# EAGLE board Zio Eink Display 2.1 (EAGLE 8.6.1)
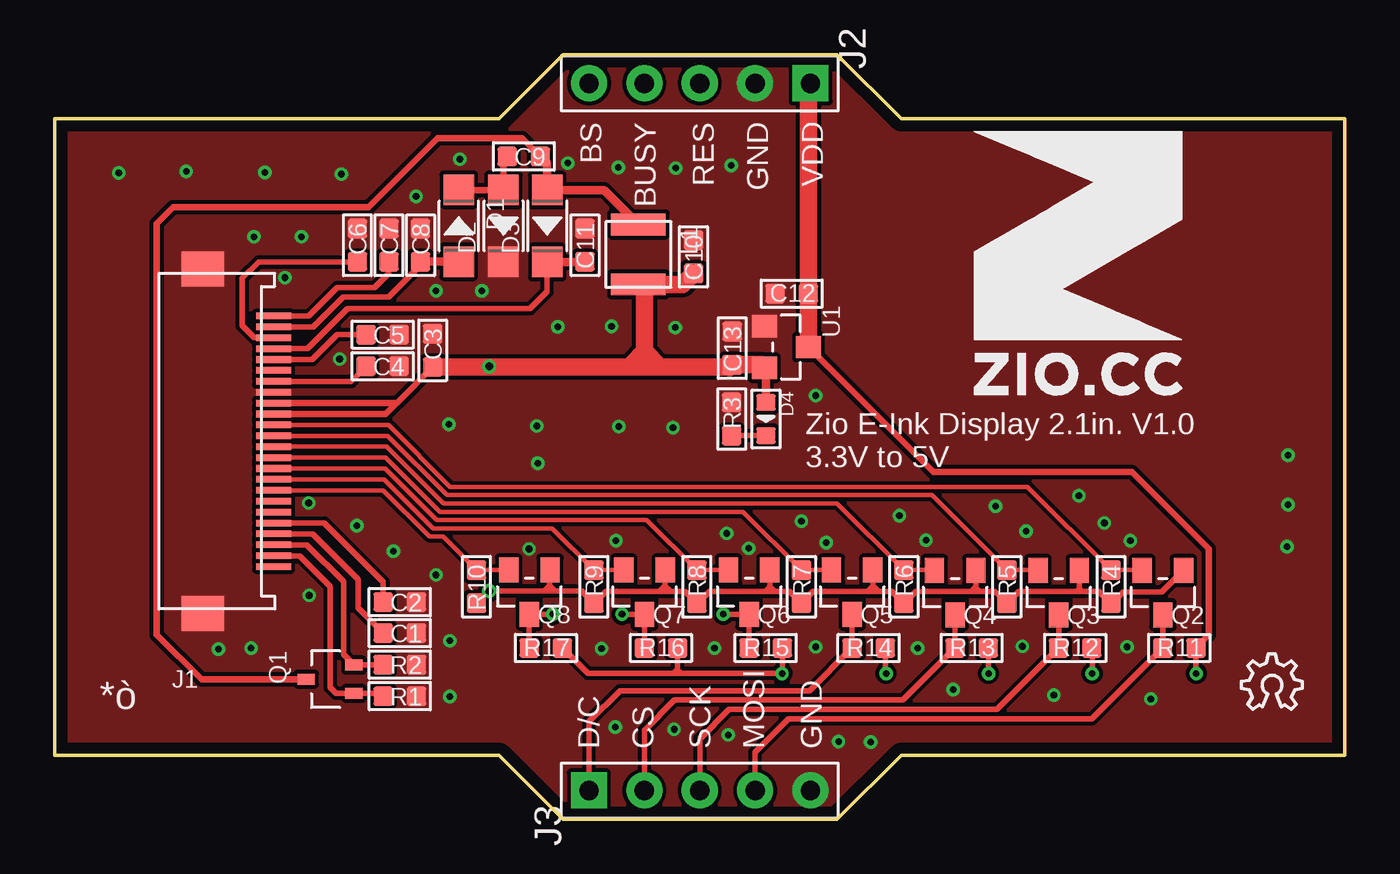
[diagram p0: board, top side]
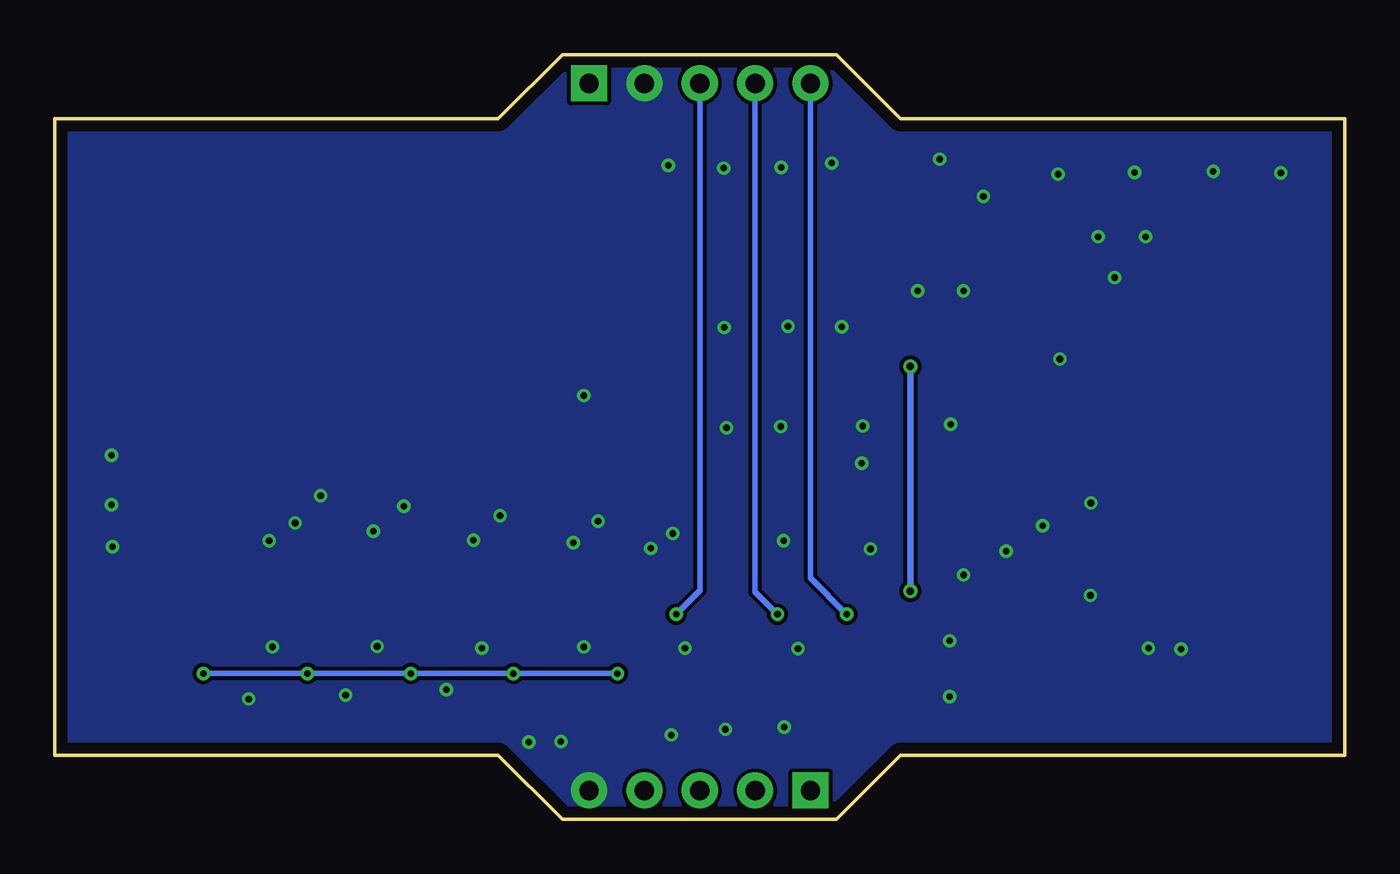
[diagram p1: board, bottom side, seen from below]

Size 59.2 x 35.09 mm. Coordinates in mm from the lower left corner, seen from the top.
Outline: 0,2.95 20.39,2.95 23.33,0 35.9,0 38.85,2.95 59.2,2.95 59.2,32.15 38.85,32.15 35.9,35.09 23.33,35.09 20.39,32.15 0,32.15 0,2.95
Copper layers (1*16): Top 0.035mm / dielectric 1.5mm / Bottom 0.035mm
Design rules "NOA Eagle Rule": minimum track width 7mil, minimum drill 12mil, track to track 7mil, track to pad 7mil, pad to pad 7mil, via to via 7mil, smd to smd 0mil, copper to edge 20mil, drill to drill 10mil, minimum pad ring 10mil, minimum via ring 6mil, stop-mask expansion 2mil, vias tented up to drill 25mil, thermal gap 10mil

## Footprints (pad centres in the part's own frame; a part is rotated, then mirrored left to right if it is on the bottom)
0603 = smd 0.889 x 0.889: 1 -0.762,0; 2 0.762,0
SOD123 = smd 1.397 x 1.397: + 1.651,0; - -1.651,0
LED-0603 = smd 0.762 x 0.889: + -0.762,0; - 0.762,0
FPC-0.5-24P_UP = smd 0.3 x 1.6: 1 -5.75,-0.05; 2 -5.25,-0.05; 3 -4.75,-0.05; 4 -4.25,-0.05; 5 -3.75,-0.05; 6 -3.25,-0.05; 7 -2.75,-0.05; 8 -2.25,-0.05; 9 -1.75,-0.05; 10 -1.25,-0.05; 11 -0.75,-0.05; 12 -0.25,-0.05; 13 0.25,-0.05; 14 0.75,-0.05; 15 1.25,-0.05; 16 1.75,-0.05; 17 2.25,-0.05; 18 2.75,-0.05; 19 3.25,-0.05; 20 3.75,-0.05; 21 4.25,-0.05; 22 4.75,-0.05; 23 5.25,-0.05; 24 5.75,-0.05 | smd 1.6 x 1.95: 25 7.9,3.2; 26 -7.9,3.2
5P-2.54 = drill 0.889 pad 1.651 square: 1 0,5.08 | drill 0.889 pad 1.651: 2 0,2.54; 3 0,0; 4 0,-2.54; 5 0,-5.08
L3012 = smd 2.5 x 1: P$1 0,1.373; P$2 0,-1.373
SOT-323 = smd 0.5 x 0.8: 1 0.65,0; 2 -0.65,0; 3 0,-2.2
SOT23 = smd 0.889 x 1.143: 1 -0.95,-1.016; 2 0.95,-1.016; 3 0,1.016
SOT23' = smd 1.016 x 1.143: 1 -0.95,-1.016; 2 0.95,-1.016; 3 0,1.016

## Placement (x,y rotation side)
C1  1uF ±10% 10V  [0603]  15.84,8.54 180 top
C2  1uF ±10% 10V  [0603]  15.84,9.97 180 top
C3  1uF ±10% 10V  [0603]  17.35,21.52 270 top
C4  1uF ±10% 10V  [0603]  15.05,20.79 180 top
C5  1uF ±10% 10V  [0603]  15.05,22.24 180 top
C6  1uF ±10% 10V  [0603]  13.89,26.34 270 top
C7  1uF ±10% 10V  [0603]  15.34,26.34 270 top
C8  1uF ±10% 50V  [0603]  16.79,26.34 270 top
C9  1uF ±10% 10V  [0603]  21.53,30.41 180 top
C10  4.7uF ±10% 10V  [0603]  29.31,25.81 270 top
C11  1uF ±10% 50V  [0603]  24.33,26.34 270 top
C12  1uF ±10% 10V  [0603]  33.82,24.12 0 top
C13  1uF ±10% 10V  [0603]  31.09,21.62 270 top
D1  MBR0530  [SOD123]  18.54,27.23 270 top
D2  MBR0530  [SOD123]  20.6,27.23 90 top
D3  MBR0530  [SOD123]  22.6,27.23 90 top
D4  RLED  [LED-0603]  32.64,18.37 270 top
J1  FPC-0.5-24P-UP  [FPC-0.5-24P_UP]  10,17.35 90 top
J2  [5P-2.54]  29.6,33.77 270 top
J3  [5P-2.54]  29.6,1.32 90 top
L1  68uH 1A  [L3012]  26.79,25.92 180 top
Q1  Si1304BDL  [SOT-323]  13.74,6.43 270 top
Q2  2N7002  [SOT23]  50.84,10.4 180 top
Q3  2N7002  [SOT23]  46.07,10.4 180 top
Q4  2N7002  [SOT23]  41.32,10.4 180 top
Q5  2N7002  [SOT23]  36.59,10.42 180 top
Q6  2N7002  [SOT23]  31.87,10.42 180 top
Q7  2N7002  [SOT23]  27.07,10.42 180 top
Q8  2N7002  [SOT23]  21.78,10.42 180 top
R1  10K ±1%  [0603]  15.84,5.65 180 top
R2  3R ±1%  [0603]  15.84,7.1 180 top
R3  1K ±1%  [0603]  31.07,18.37 270 top
R4  4.7K ±1%  [0603]  48.46,10.67 270 top
R5  4.7K ±1%  [0603]  43.69,10.67 270 top
R6  4.7K ±1%  [0603]  38.96,10.67 270 top
R7  4.7K ±1%  [0603]  34.27,10.67 270 top
R8  4.7K ±1%  [0603]  29.47,10.67 270 top
R9  4.7K ±1%  [0603]  24.74,10.67 270 top
R10  4.7K ±1%  [0603]  19.36,10.67 270 top
R11  4.7K ±1%  [0603]  51.6,7.86 0 top
R12  4.7K ±1%  [0603]  46.82,7.86 0 top
R13  4.7K ±1%  [0603]  42.07,7.86 0 top
R14  4.7K ±1%  [0603]  37.35,7.86 0 top
R15  4.7K ±1%  [0603]  32.62,7.86 0 top
R16  4.7K ±1%  [0603]  27.82,7.86 0 top
R17  4.7K ±1%  [0603]  22.54,7.86 0 top
U1  XC6206P332MR  [SOT23']  33.58,21.67 270 top
U$9  [12MM]  42.09,19.39 0 top
U$10  [OSHW_6X100_NOTEXT]  54.43,5.04 0 top

## Library data of the parts
C1-C13 D1-D4 L1 Q1-Q8 R1-R17 = Discretex
J1-J3 = Connector
U1 = IC
U$9 = ZIO_silkscreen_package
U$10 = Logo_OSHW

## Nets
+3V3: C3.2 C10.2 C13.2 D4.+ J1.15 J1.16 L1.P$1 Q2.1 Q3.1 Q4.1 Q5.1 Q6.1 Q7.1 Q8.1 R4.2 R5.2 R6.2 R7.2 R8.2 R9.2 R10.2 U1.2
+VDD: C4.2 J1.18
BS: J2.5 Q8.3 R17.1
BS_3V3: J1.8 Q8.2 R10.1
BUSY: J2.4 Q7.3 R16.1
BUSY_3V3: J1.9 Q7.2 R9.1
CS: J3.2 Q4.3 R13.1
CS_3V3: J1.12 Q4.2 R6.1
D/C: J3.1 Q5.3 R14.1
D/C_3V3: J1.11 Q5.2 R7.1
GDR: J1.2 Q1.1 R1.2
GND: C1.1 C2.1 C3.1 C4.1 C5.1 C6.1 C7.1 C8.1 C10.1 C11.1 C12.1 C13.1 D2.- J1.17 J1.25 J1.26 J2.2 J3.5 R1.1 R2.1 R3.1 U1.1
MOSI: J3.4 Q2.3 R11.1
MOSI_3V3: J1.14 Q2.2 R4.1
N$2: C9.2 D1.- D2.+
N$3: C9.1 D3.+ L1.P$2 Q1.3
N$7: D4.- R3.2
NC: J1.1
PREVGH: C11.2 D3.- J1.21
PREVGL: C8.2 D1.+ J1.23
RES: J2.3 Q6.3 R15.1
RES_3V3: J1.10 Q6.2 R8.1
RESE: J1.3 Q1.2 R2.2
SCK: J3.3 Q3.3 R12.1
SCK_3V3: J1.13 Q3.2 R5.1
TSCL: J1.6
TSDA: J1.7
VCOM: C7.2 J1.24
VDD: C12.2 J2.1 R11.2 R12.2 R13.2 R14.2 R15.2 R16.2 R17.2 U1.3
VGH: C2.2 J1.5
VGL: C1.2 J1.4
VPP: J1.19
VSH: C5.2 J1.20
VSL: C6.2 J1.22

## Tracks (layer width: path | path; a pad name or v marks a point on that pad's centre or on a via)
+3V3  (via drill 0.35)
  Top 0.254: 22.48,10.48 22.71,10.48 | 22.48,10.48 v19.94,10.48 19.93,10.48 R10.2 | 22.94,10.48 22.71,10.48 | 22.94,10.48 24.17,10.48 R9.2 24.75,9.91 25.3,10.45 27.76,10.45 | 27.76,10.45 28.02,10.45 | 28.27,10.45 28.02,10.45 | 28.27,10.45 28.92,10.45 R8.2 29.5,9.91 30.05,10.45 32.61,10.45 | 32.61,10.45 32.87,10.45 | 33.02,10.45 32.87,10.45 | 33.02,10.45 33.72,10.45 R7.2 34.8,10.45 37.31,10.45 | 37.31,10.45 37.54,10.45 | 37.8,10.45 37.54,10.45 | 37.8,10.45 38.42,10.45 R6.2 39.51,10.45 42.06,10.45 | 42.06,10.45 42.27,10.45 | 42.44,10.45 42.27,10.45 | 42.44,10.45 43.13,10.45 43.67,9.91 R5.2 44.23,10.45 46.89,10.45 | 46.89,10.45 47.02,10.45 | 47.14,10.45 47.02,10.45 | 47.14,10.45 47.93,10.45 47.93,10.44 R4.2 48.5,9.91 49.02,10.43 50.8,10.43 Q2.1 51.79,11.59 | Q3.1 47.02,10.58 | 47.02,10.58 47.02,10.45 | 47.02,10.58 46.89,10.45 | 47.02,10.58 | 47.02,10.58 47.14,10.45 | Q4.1 42.27,10.65 | 42.27,10.63 42.27,10.45 | 42.27,10.45 | 42.27,10.65 42.06,10.45 | 42.27,10.65 42.27,10.63 | 42.27,10.63 42.44,10.45 | Q5.1 37.54,10.65 | 37.54,10.65 37.54,10.45 | 37.54,10.45 | 37.54,10.65 37.52,10.65 37.31,10.45 | 37.54,10.65 37.59,10.65 37.8,10.45 | Q6.1 32.82,10.65 | 32.82,10.65 32.82,10.5 32.87,10.45 | 32.82,10.65 32.61,10.45 | 32.82,10.65 33.02,10.45 | Q7.1 | Q7.1 28.02,10.71 | 28.02,10.71 28.02,10.45 | 28.02,10.71 27.76,10.45 | 28.02,10.71 28.27,10.45 | Q8.1 22.71,11.41 22.71,10.71 | 22.71,10.71 22.71,10.48 | 22.71,10.71 22.48,10.48 | 22.71,10.71 22.94,10.48 | 32.73,19.21 D4.+ | 31.17,20.78 C13.2
  Top 0.305: v19.94,20.78 20.67,20.78 20.69,20.75 | J1.15 15.19,18.6 15.69,19.1 | C3.2 15.75,19.16 15.69,19.1 | J1.16 15.69,19.1
  Top 0.381: D4.+ 32.64,20.64 U1.2
  Top 0.813: U1.2 32.43,20.86 C13.2 | C3.2 20.69,20.75 26.44,20.75 | C13.2 30.96,20.73 | 26.44,20.75 27.03,20.75 | 27.03,20.75 27.76,20.75 | 27.76,20.75 30.99,20.75 C13.2 | 27.07,21.48 27.07,20.79 27.03,20.75 | 27.07,21.48 26.44,20.85 26.44,20.75 | 27.07,21.48 27.76,20.78 27.76,20.75 | 27.07,21.48 27.07,24.27 L1.P$1 28.81,24.55 C10.2
  Bottom 0.305: v19.94,10.48 v19.94,20.78
+VDD
  Top 0.203: C4.2
  Top 0.254: J1.18 13.6,20.1 C4.2
BS  (via drill 0.3)
  Top 0.254: R17.1 Q8.3 v22.86,9.41
  Bottom 0.254: J2.5 24.52,11.07 v22.86,9.41
BS_3V3
  Top 0.203: Q8.2 R10.1 17.82,12.97 17.21,12.97 15.08,15.1 11.42,15.1 11.41,15.1 J1.8
BUSY  (via drill 0.3)
  Top 0.254: R16.1 Q7.3 v26.04,9.41
  Bottom 0.254: J2.4 27.06,10.44 v26.04,9.41
BUSY_3V3
  Top 0.203: Q7.2 26.11,11.43 R9.1 22.82,13.35 17.37,13.35 15.12,15.6 J1.9
CS
  Top 0.254: Q4.3 R13.1 38.92,5.47 28.45,5.47 27.06,4.09 J3.2
CS_3V3
  Top 0.203: Q4.2 40.35,11.43 R6.1 35.9,14.49 17.84,14.49 15.24,17.1 J1.12
D/C
  Top 0.254: Q5.3 R14.1 34.63,5.9 25.93,5.9 24.52,4.49 J3.1
D/C_3V3
  Top 0.203: Q5.2 R7.1 31.58,14.11 17.68,14.11 15.2,16.6 J1.11
GDR
  Top 0.254: R1.2 14.95,5.78 Q1.1 12.93,5.78 12.65,6.06 12.65,10.68 11.25,12.08 10.07,12.08 J1.2
GND  (via drill 0.3)
  other vias: 39.6,7.86 44.4,7.94 49.2,7.91 25.76,12.79 31.85,12.43 35.41,12.69 39.98,12.81 44.58,13.22 49.35,12.79 6.05,29.73 48.16,13.6 46.99,14.85 43.18,14.36 38.76,13.93 34.26,13.68 30.84,13.12 21.77,12.41 9.65,29.68 16.59,28.59 18.59,30.29 13.08,21.12 11.66,14.51 9.02,7.86 11.68,10.27 34.92,19.44 45.85,5.7 41.22,5.96 37.44,3.54 56.59,16.7 28.37,17.97 18.08,18.12 22.17,16.34 25.55,22.62 19.61,24.24 23.09,22.59 25.88,18.02 28.47,22.57 22.12,18.05 2.95,29.65 13.16,29.6 17.5,24.24 7.52,7.81 13.87,13.47 15.54,12.31 17.5,11.21 18.14,8.19 18.14,5.62 35.97,3.57 50.29,5.52 56.59,14.44 56.54,12.51 34.92,7.91 30.28,7.86 25.1,7.83 25.86,29.91 28.5,29.88 31.04,30.01 23.55,30.11 9.14,26.73 11.33,26.73 10.57,24.85 25.73,4.23 28.42,4.13 30.91,3.87
  pour Bottom (no thermals): 0,0 0,35.09 59.2,35.09 59.2,0
  pour Top (no thermals): 0,0 59.2,0 59.2,35.09 0,35.09
MOSI
  Top 0.254: Q2.3 R11.1 47.58,4.61 33.68,4.61 32.14,3.07 J3.4
MOSI_3V3
  Top 0.203: Q2.2 49.87,11.43 R4.1 44.64,15.26 18.16,15.26 15.32,18.1 J1.14
N$2
  Top 0.305: D1.- D2.+ 20.6,30.25 C9.2
N$3
  Top 0.305: Q1.3 6.74,6.43 4.7,8.47 4.7,27.34 5.44,28.08 14.4,28.08 17.58,31.25 21.45,31.25 C9.1
  Top 0.381: L1.P$2 25.2,28.88 D3.+ 22.61,30.1 C9.1
N$7
  Top 0.254: D4.- R3.2
PREVGH
  Top 0.254: D3.- 22.61,24.22 21.82,23.43 13.44,23.43 11.6,21.6 J1.21 | C11.2
  Top 0.381: D3.- C11.2
PREVGL
  Top 0.254: C8.2 16.79,25.44 15.32,23.96 13.23,23.96 11.87,22.6 J1.23
  Top 0.381: C8.2 D1.+
RES  (via drill 0.3)
  Top 0.254: R15.1 Q6.3 v30.68,9.41
  Bottom 0.254: J2.3 29.6,10.49 v30.68,9.41
RES_3V3
  Top 0.203: Q6.2 30.91,11.43 R8.1 27.16,13.73 17.52,13.73 15.16,16.1 J1.10
RESE
  Top 0.254: R2.2 15.06,7.08 Q1.2 13.26,7.56 13.26,10.91 11.57,12.6 J1.3
SCK
  Top 0.254: Q3.3 R12.1 43.24,5.04 30.94,5.04 29.6,3.7 J3.3
SCK_3V3
  Top 0.203: Q3.2 45.1,11.43 R5.1 40.24,14.87 18,14.87 15.28,17.6 J1.13
VCOM
  Top 0.254: C7.2 15.33,25.05 14.68,24.4 12.95,24.4 11.65,23.1 J1.24
VDD  (via drill 0.3)
  Top 0.254: R17.2 24.47,6.69 28.4,6.69 | 28.75,6.69 28.52,6.69 | 28.75,6.69 v33.38,6.69 33.39,6.7 R15.2 | 28.4,6.69 28.52,6.69 | v52.38,6.69 52.36,6.71 R11.2 52.36,7.92 | R12.2 47.6,7.85 v47.6,6.69 | R13.2 42.83,6.71 v42.85,6.69 | R14.2 38.11,6.73 v38.15,6.69 | R16.2 28.59,6.88 | 28.59,6.86 28.59,6.75 28.52,6.69 | 28.59,6.88 28.4,6.69 | 28.59,6.88 28.59,6.86 | 28.59,6.86 28.75,6.69
  Top 0.305: U1.3 40.33,15.94 49.43,15.94 52.96,12.41 52.96,8.46 R11.2
  Top 0.813: U1.3 34.58,21.68 C12.2 34.58,33.67 J2.1
  Bottom 0.254: v33.38,6.69 v38.15,6.69 v42.85,6.69 v47.6,6.69 v52.38,6.69
VGH
  Top 0.203: 15.05,9.99 C2.2
  Top 0.254: C2.2 15.08,10.89 12.37,13.6 J1.5
VGL
  Top 0.203: C1.2
  Top 0.254: C1.2 13.92,9.7 13.92,11.01 11.83,13.1 J1.4
VSH
  Top 0.203: C5.2
  Top 0.254: C5.2 12.95,22.24 11.81,21.1 J1.20
VSL
  Top 0.254: C6.2 9.36,25.58 8.61,24.83 8.61,22.65 9.17,22.1 J1.22

## Text on the board
tPlace: BS | BUSY | RES | GND | VDD | Zio E-Ink Display 2.1in. V1.0 / 3.3V to 5V | *ò | D/C | CS | SCK | MOSI | GND